# Altium PCB PCB_Project_Board.PcbDoc
Units mil, origin at the board's own origin, x right, y up, seen from the top; angles counter-clockwise.
Board outline 6000 x 4000 mil, 2 copper layers (Top Layer, Bottom Layer); 34 components, 0 nets, 73 pads, 0 vias.
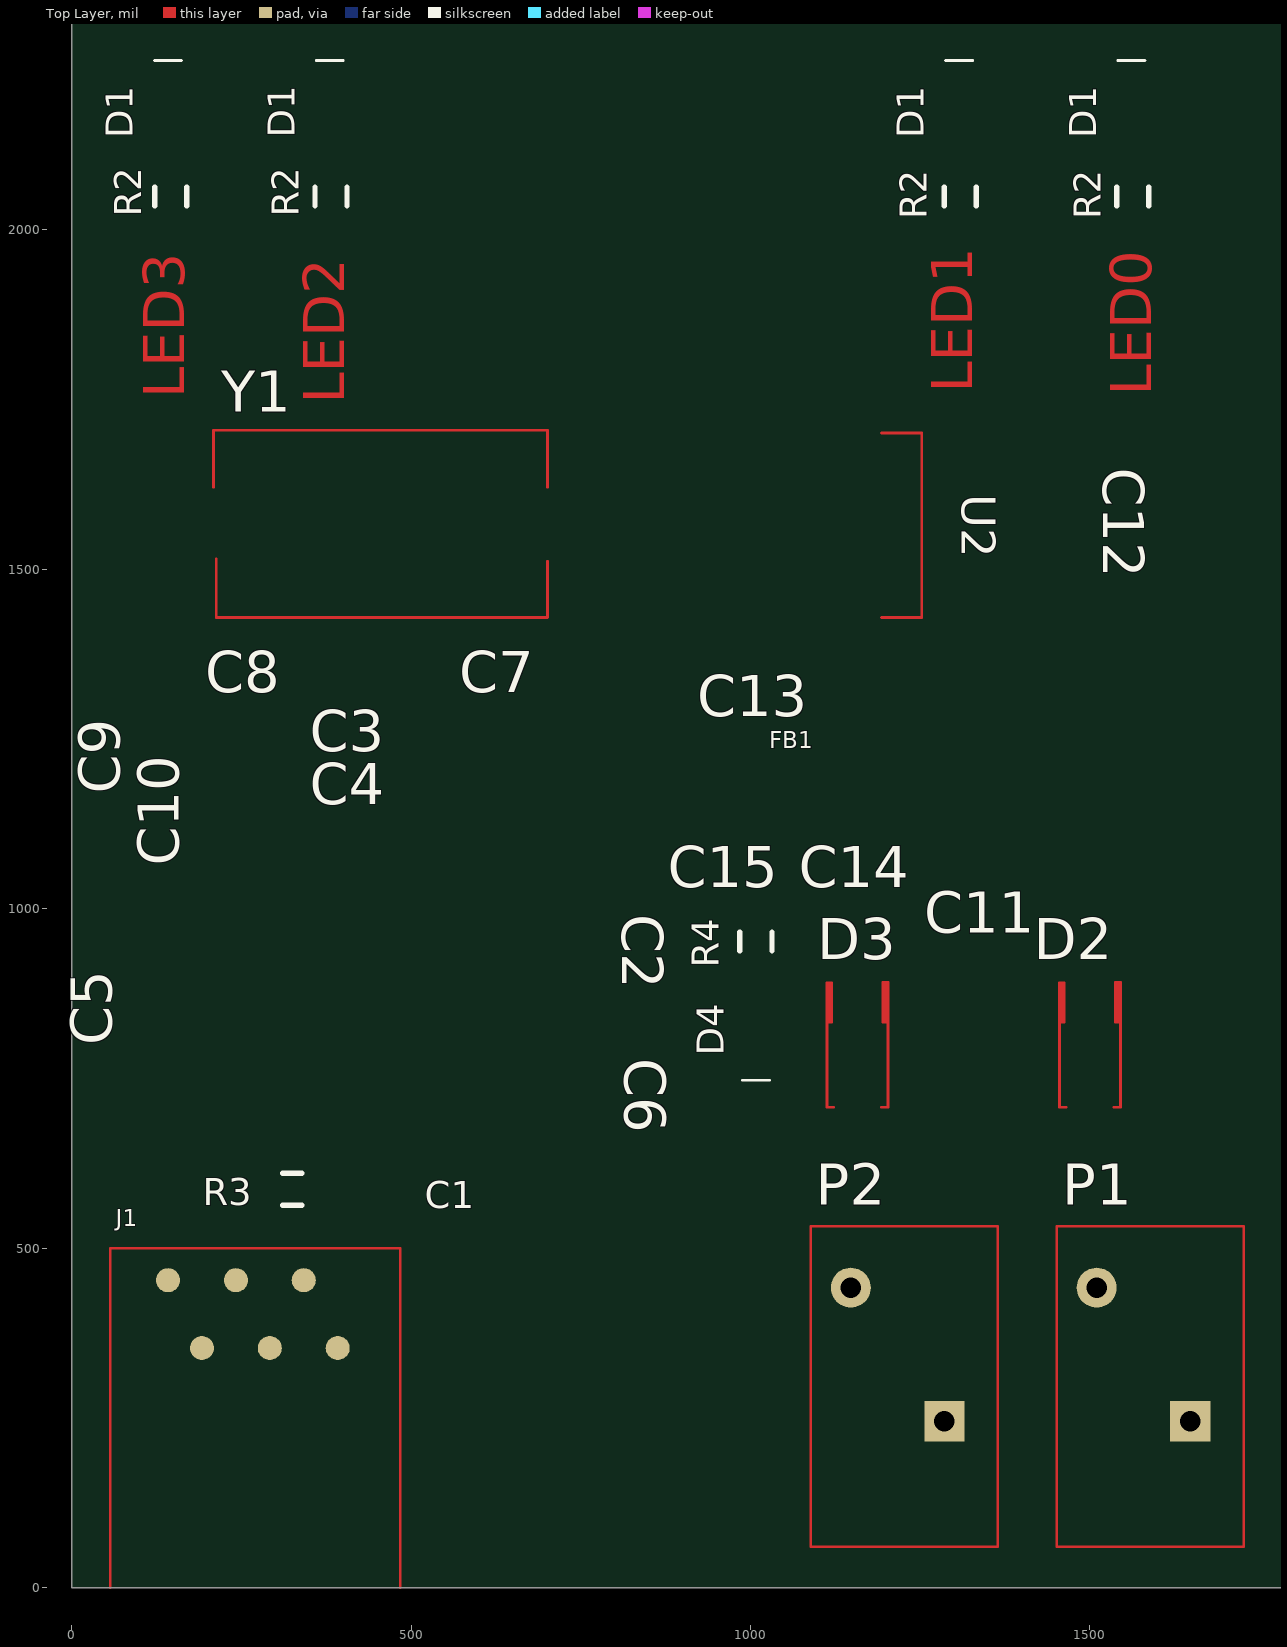
[diagram p0: Top Layer view]
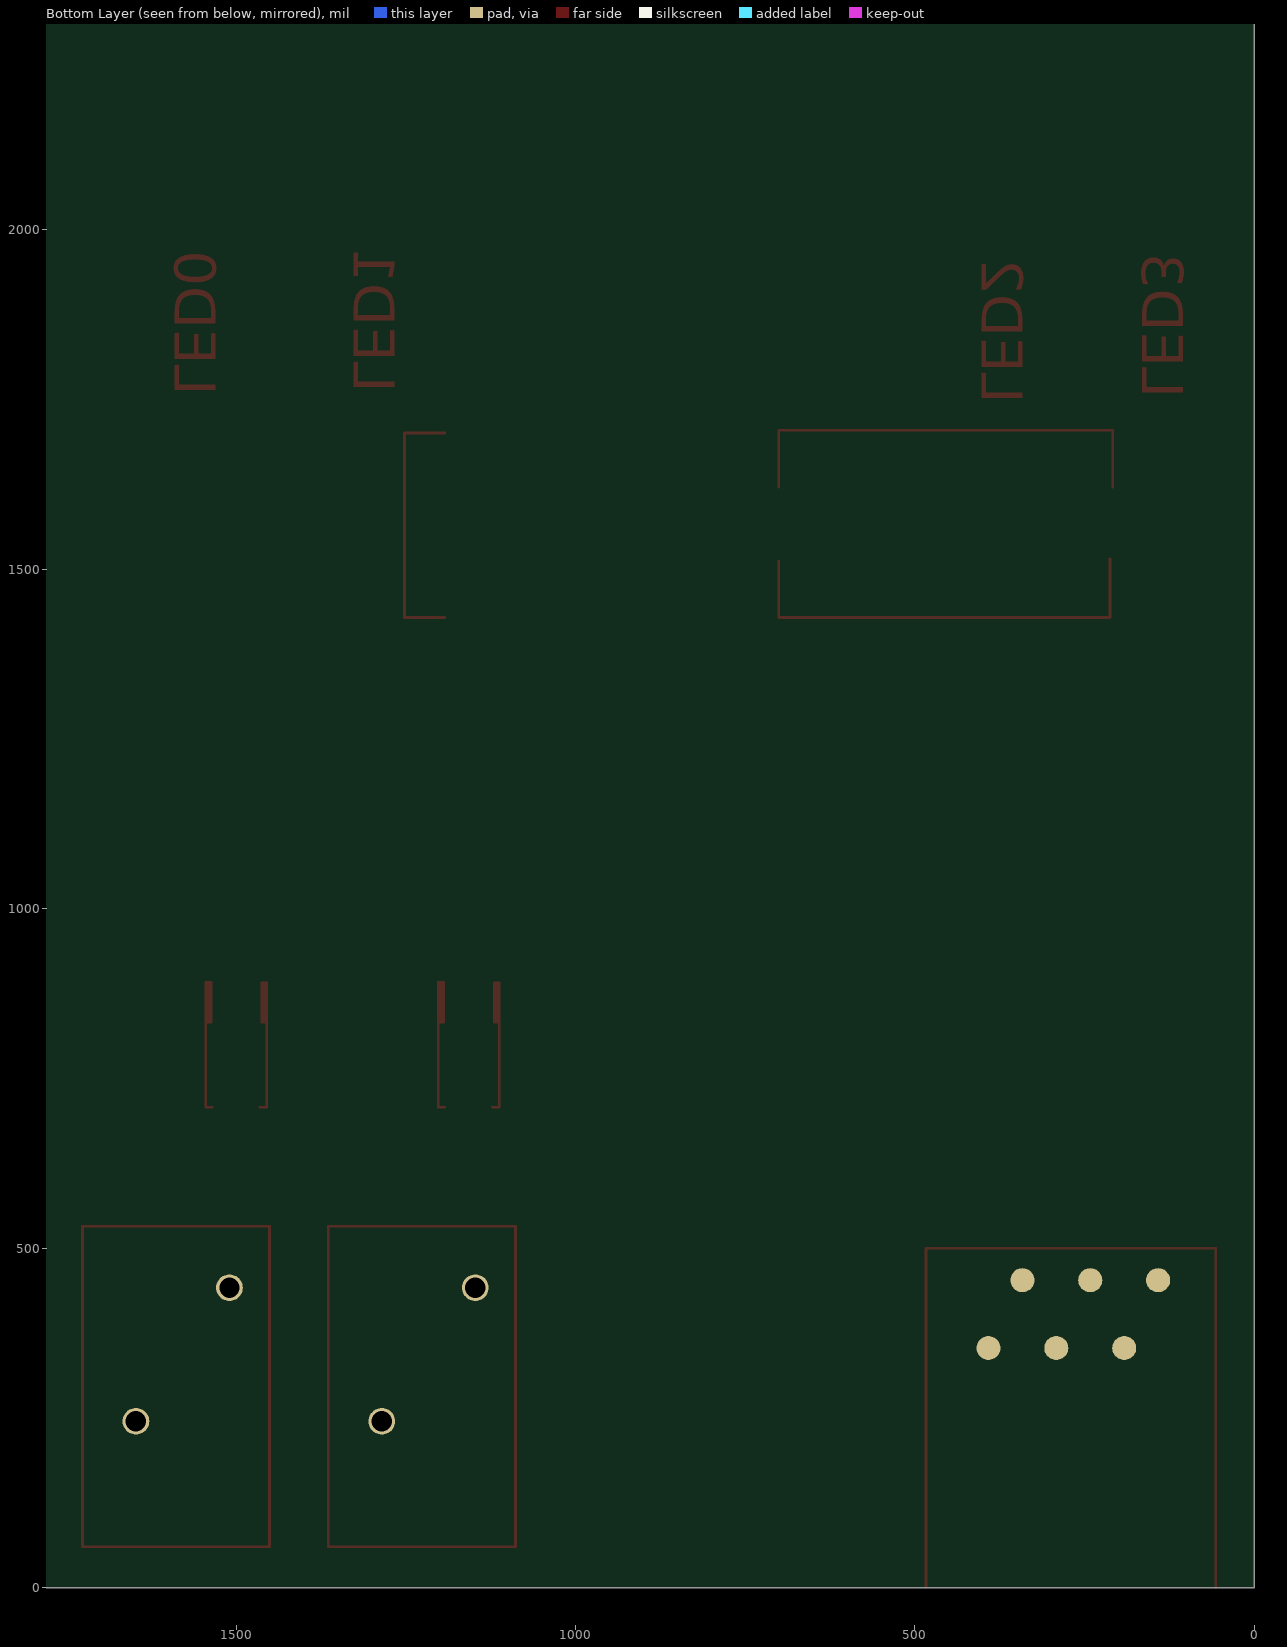
[diagram p1: Bottom Layer view, seen from below]

## Layer stack, top to bottom
Top Solder: solder mask 0.4, Solder Resist, Dk 3.5
Top Layer: signal copper 1.4
Dielectric 1: dielectric 12.6, FR-4, Dk 4.8
Bottom Layer: signal copper 1.4
Bottom Solder: solder mask 0.4, Solder Resist, Dk 3.5

## Board outline
0,0 6000,0 6000,4000 0,4000

## Design rules (kind name [scope] priority, off if disabled: settings)
Clearance [All] p1: gap=10
PolygonConnect [All] p1: connectstyle=Relief reliefconductorwidth=10 reliefentries=4 polygonreliefangle="90 Angle" airgapwidth=10
RoutingVias [All] p1: holewidth=28 width=50 viastyle="Through Hole" minholewidth=28 minwidth=50 maxholewidth=28 maxwidth=50
SolderMaskExpansion [All] p1: expansion=4
UnpouredPolygon [All] p1: allowunpoured=FALSE
Width [All] p1: maxlimit=10 minlimit=10 preferedwidth=10
29 further rules are at their usual default settings.

## Components (designator, comment, footprint, x,y, rotation, side; value= is the part's Value field where it differs from the comment)
C1 "Comment" CAPC1608N 484.25,586.61 r90 top
C2 "Comment" CAPC1608N 759.84,925.2 r180 top
C3 "Comment" CAPC1608N 606.3,1263.78 r90 top
C4 "Comment" CAPC1608N 606.3,1177.17 r90 top
C5 "Comment" CAPC1608N 129.92,818.9 r0 top
C6 "Comment" CAPC1608N 759.84,799.21 r180 top
C7 "Comment" CAPC1608N 535.43,1350.39 r90 top
C8 "Comment" CAPC1608N 409.45,1350.39 r90 top
C9 "Comment" CAPC2012N 55.12,952.76 r90 top
C10 "Comment" CAPC1608N 129.92,944.88 r0 top
C11 "Comment" CAPC2012N 1326.77,906.3 r270 top
C12 "Comment" CAPC2012N 1476.38,1496.85 r90 top
C13 "Comment" CAPC2012N 1279.53,1311.02 r180 top
C14 "Comment" CAPC1608N 1145.67,1201.57 r180 top
C15 "Comment" CAPC1608N 956.69,1201.57 r180 top
D1 "Comment" "LED 0805" 141.73,2149.61 r90 top
D1 "Comment" "LED 0805" 379.92,2149.61 r90 top
D1 "Comment" "LED 0805" 1307.09,2149.61 r90 top
D1 "Comment" "LED 0805" 1561.02,2149.61 r90 top
D2 "Comment" SMA/DO-214AC_21 1500,863.7 r90 top
D3 "Comment" SMA/DO-214AC_21 1157.48,863.7 r90 top
D4 "Comment" "LED 0805" 1007.87,847.24 r270 top
FB1 "Comment" INDC1608AN 1027.56,1200.79 r0 top
J1 "Comment" RJ12_90 141.73,452.76 r0 top
P1 "Comment" PDB181-K415K-102A2 1450.79,532.28 r0 top
P2 "Comment" PDB181-K415K-102A2 1088.58,532.28 r0 top
R2 "Comment" RESC1608N 1562.99,2015.75 r0 top
R2 "Comment" RESC1608N 1309.05,2015.75 r0 top
R2 "Comment" RESC1608N 381.89,2015.75 r0 top
R2 "Comment" RESC1608N 145.67,2015.75 r0 top
R3 "Comment" RESC1608N 358.26,586.61 r90 top
R4 "Comment" RESC1608N 1007.87,985.04 r180 top
U2 "Comment" TD03B_N 1055.12,1566.93 r90 top
Y1 "Comment" "HC49/4H SMX CRYSTAL" 267.72,1566.93 r0 top

## Footprints (in the part's own frame and the unit in brackets; to place one, negate y for a bottom-side part, rotate by r counter-clockwise, add the part's x,y. Pads: shape width x height; smd on the part's side, far side on the other; paste and mask are expansions set on the pad)
CAPC1608N [mm] "100nF"
  rect 1.6x0.8 on Top Solder: 1(0,0) 6(0,1.77)
CAPC2012N [mm]
  rect 2x1.25 on Top Solder: 2(0,0) 3(3.8,0)
"HC49/4H SMX CRYSTAL" [mm]
  rect 5.5x2 on Top Solder: 1(0,0) 5(9.5,0)
  Top Layer lines w0.1: -1.5,1.375 -1.5,3.5 11,3.5 11,1.375 ; -1.4,-1.3 -1.4,-3.5 11,-3.5 11,-1.4
INDC1608AN [mm]
  rect 0.75x0.7 on Top Solder: 8(0,0) 9(1.45,0)
"LED 0805" [mm]
  rect 1.25x1.1 on Top Solder: 0(0,0) 1.1(1.725,0)
  silkscreen extent 2.54,-0.51 2.54,0.51
PDB181-K415K-102A2 [mm]
  round 1.5 / inner round 1.5 / far side round 1 hole 0.762: 12(1.5,-2.3)
  rect 1.5x1.5 / inner round 1.524 / far side round 1 hole 0.762: 13(5,-7.3)
  Top Layer lines w0.1: 0,-12 0,0 7,0 7,-12 0,-12
RESC1608N [mm]
  rect 1.6x0.8 on Top Solder: 7(0,0) 7(0,1.705)
  silkscreen extent -0.6,0.5 0.6,1.2
RJ12_90 [mm]
  round 0.9 all layers, no hole: 11(0,0) 11(1.27,-2.54) 11(2.54,0) 11(3.81,-2.54) 11(5.08,0) 11(6.35,-2.54)
  Top Layer lines w0.1: -2.159,-11.5 -2.159,1.194 8.687,1.194 8.687,-11.5
SMA/DO-214AC_21 [mm]
  rect 1.52x1.68 on Top Solder: 5(-3.454,0) 6(-0.004,0)
  Top Layer region: -0.787,-1.143 0.711,-1.143 0.711,-0.94 -0.787,-0.94
  Top Layer region: -0.787,0.965 0.686,0.965 0.686,1.143 -0.787,1.143
  Top Layer lines w0.1: -0.787,1.143 -0.787,0.965 0.686,0.965 0.686,1.143 -3.962,1.143 -3.962,0.889 ; -3.962,-0.889 -3.962,-1.143 0.711,-1.143 0.711,-0.94 -0.787,-0.94 -0.787,-1.143
TD03B_N [mm]
  rect 5.6x5.6 on Top Solder: 9(0,0)
  rect 1.2x2 on Top Solder: 10(2.25,-7.2) 11(-2.25,-7.2)
  Top Layer lines w0.1: -3.5,-3.5 -3.5,-5 3.4,-5 3.4,-3.5

## Nets (pads, with @x,y where several pads share a name; then routed paths per layer and width w, separated by ;. In a path a pad name is that pad's centre, name@x,y a point inside that pad or via, vN(x,y) a via of type N, cw(c..) or ccw(c..) an arc to the next point about the centre after c; other vN are vias at no path point)
pads on no net: C1.1 C1.6 C2.1 C2.6 C3.1 C3.6 C4.1 C4.6 C5.1 C5.6 C6.1 C6.6 C7.1 C7.6 C8.1 C8.6 C9.2 C9.3 C10.1 C10.6 C11.2 C11.3 C12.2 C12.3 C13.2 C13.3 C14.1 C14.6 C15.1 C15.6 D1.0 D1.1.1 D2.5 D2.6 D3.5 D3.6 D4.0 D4.1.1 FB1.8 FB1.9 J1.11 P1.12 P1.13 P2.12 P2.13 R2.7 R3.7 R4.7 U2.9 U2.10 U2.11 Y1.1 Y1.5

## Other copper
Top Layer:
  text "LED1" at 1326.77,1759.84 h60 r90
  text "LED0" at 1590.55,1755.91 h60 r90
  text "LED3" at 165.35,1751.97 h60 r90
  text "LED2" at 401.57,1744.09 h60 r90